# EAGLE board experiencia_1_teste (EAGLE 9.7.0)

Size 171.56 x 59.69 mm. Coordinates in mm from the lower left corner, seen from the top.
Outline: 0,0 171.56,0 171.56,59.69 0,59.69 0,0
Copper layers (1*16): Top 0.035mm / dielectric 1.5mm / Bottom 0.035mm
Design rules "default": minimum track width 6mil, minimum drill 0.35mm, track to track 6mil, track to pad 6mil, pad to pad 6mil, via to via 6mil, smd to smd 6mil, copper to edge 40mil, drill to drill 6mil, minimum pad ring 10mil, minimum via ring 8mil, stop-mask expansion 4mil, vias tented up to drill 0mil, thermal gap 10mil

## Footprints (pad centres in the part's own frame; a part is rotated, then mirrored left to right if it is on the bottom)
LEDRD254W60D565H860B_B = drill 0.981 pad 1.581: 1 -1.27,0; 2 1.27,0
LEDRD254W60D565H860B = drill 0.981 pad 1.581: 1 -1.27,0; 2 1.27,0
LEDRD254W60D565H860B_G = drill 0.981 pad 1.581: 1 -1.27,0; 2 1.27,0
RESAD1016W63L850D250B = drill 0.83 pad 1.43: 1 -5.08,0; 2 5.08,0
ARDUINO-UNO-R3-SHIELD = drill 1.016 pad 1.88: 3.3V 24.13,-2.54; 5V 24.13,0; A0 24.13,12.7; A1 24.13,15.24; A2 24.13,17.78; A3 24.13,20.32; A4 24.13,22.86; A5 24.13,25.4; AREF -24.13,-13.97; D2 -24.13,20.32; D3 -24.13,17.78; D4 -24.13,15.24; D5 -24.13,12.7; D6 -24.13,10.16; D7 -24.13,7.62; D8 -24.13,3.81; D9 -24.13,1.27; D10 -24.13,-1.27; D11 -24.13,-3.81; D12 -24.13,-6.35; D13 -24.13,-8.89; GND@0 24.13,2.54; GND@1 24.13,5.08; GND@2 -24.13,-11.43; IOREF 24.13,-7.62; NC 24.13,-10.16; RES 24.13,-5.08; RX -24.13,25.4; SCL -24.13,-19.05; SDA -24.13,-16.51; TX -24.13,22.86; VIN 24.13,7.62

## Placement (x,y rotation side)
DLED_1  BLUE  [LEDRD254W60D565H860B_B]  125.86,36.31 180 top
DLED_2  RED  [LEDRD254W60D565H860B]  148.72,36.31 180 top
DLED_3  GREEN  [LEDRD254W60D565H860B_G]  105.54,36.31 180 top
R1  1k  [RESAD1016W63L850D250B]  137.29,36.31 90 top
R2  1k  [RESAD1016W63L850D250B]  114.43,36.31 90 top
RRESISTOR  1k  [RESAD1016W63L850D250B]  165.23,36.31 90 top
U1  ARDUINO-UNO-R3-SHIELD  [ARDUINO-UNO-R3-SHIELD]  47.88,29.84 270 top

## Library data of the parts
DLED_1 = Tinkercad; CATEGORY: Opto-Electronic; SUB-CATEGORY: LED; VALUE: LED_BLUE
DLED_2 = Tinkercad; CATEGORY: Opto-Electronic; SUB-CATEGORY: LED; VALUE: LED_RED
DLED_3 = Tinkercad; CATEGORY: Opto-Electronic; SUB-CATEGORY: LED; VALUE: LED_GREEN
R1 R2 RRESISTOR U1 = Tinkercad

## Nets
DLED_2_A: DLED_2.1 RRESISTOR.1 RRESISTOR.2
U1_D11: DLED_3.1 R2.1 R2.2 U1.D11
U1_D12: DLED_1.1 R1.1 R1.2 U1.D12
U1_GND: DLED_1.2 DLED_2.2 DLED_3.2 U1.GND@0 U1.GND@1 U1.GND@2

## Tracks (layer width: path | path; a pad name or v marks a point on that pad's centre or on a via)
DLED_2_A  (2 unrouted)
U1_D11  (3 unrouted)
U1_D12  (3 unrouted)
U1_GND  (5 unrouted)